# Altium PCB FPGA.PcbDoc (part 1 of 2)
Units mil, origin at the board's own origin, x right, y up, seen from the top; angles counter-clockwise.
Board outline 3947.01 x 3159.61 mil, 4 copper layers (Top Layer, Top, Mid-Layer 1, GND, Mid-Layer 2, VCC, Bottom Layer, Bottom), stack 18.2 mil thick; 141 components, 123 nets, 692 pads, 263 vias.
Unrouted connection lines stored in the file: 24.
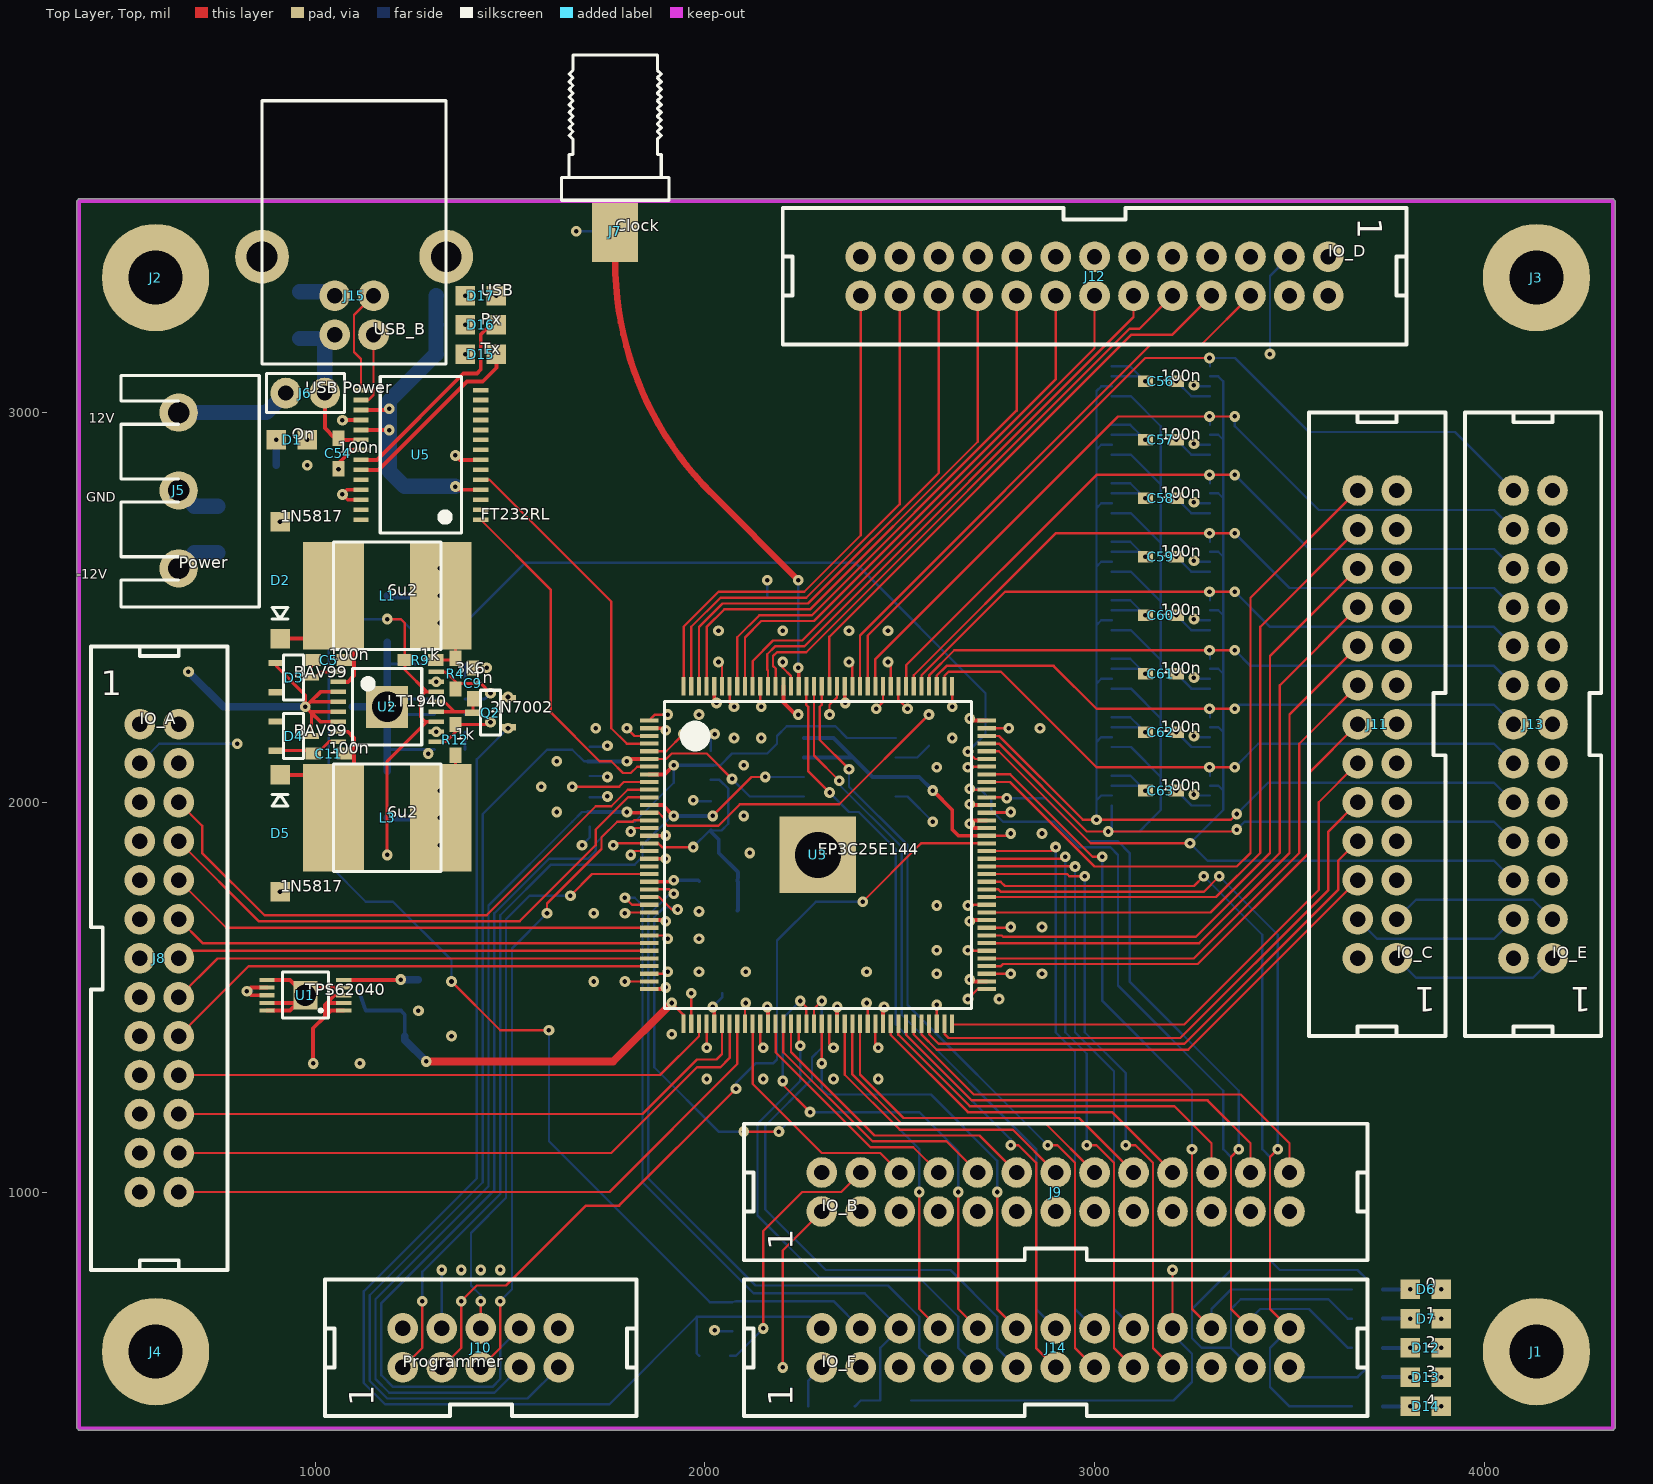
[diagram p0: Top Layer, Top view]
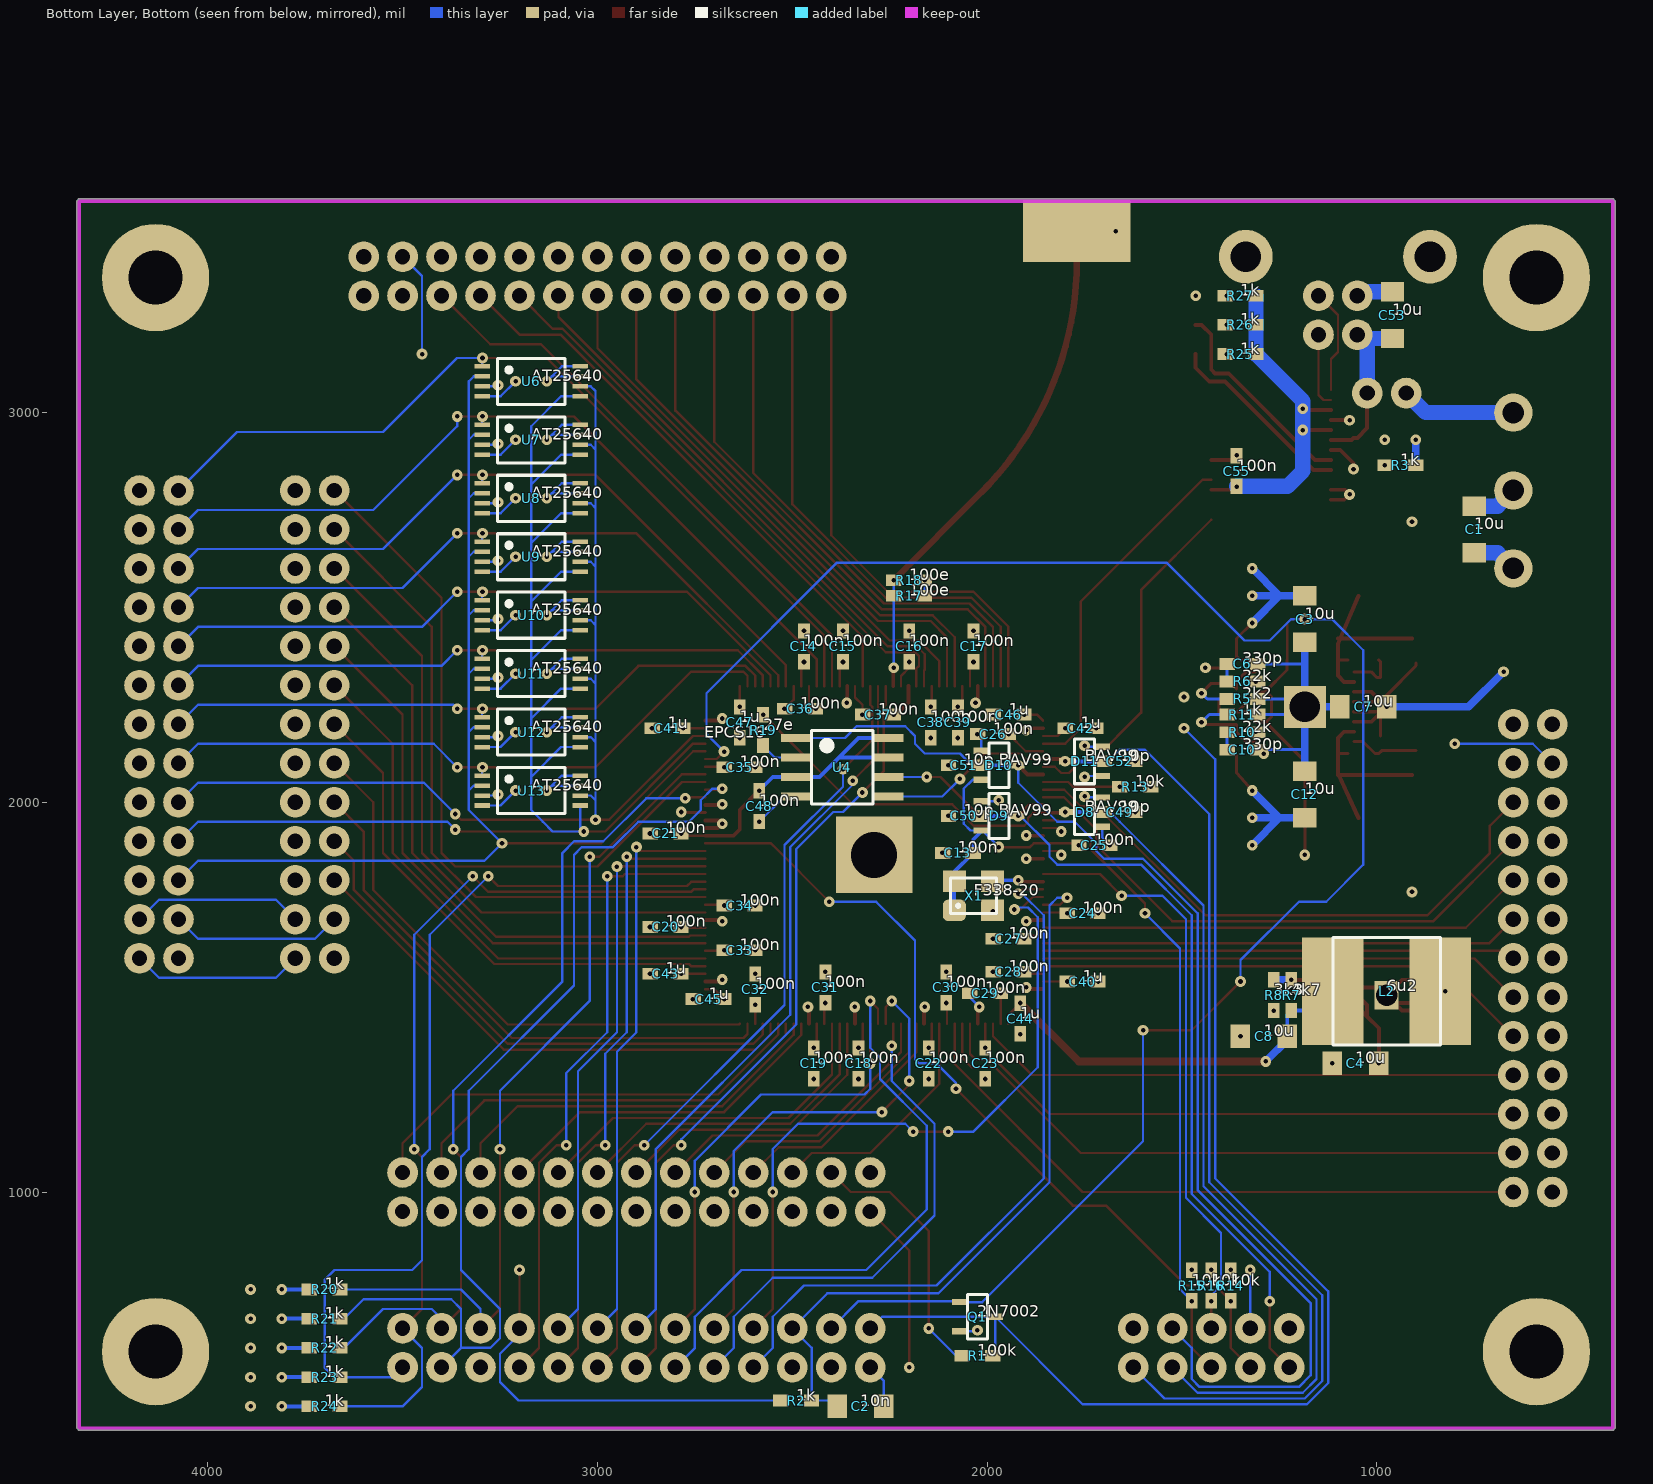
[diagram p1: Bottom Layer, Bottom view, seen from below]
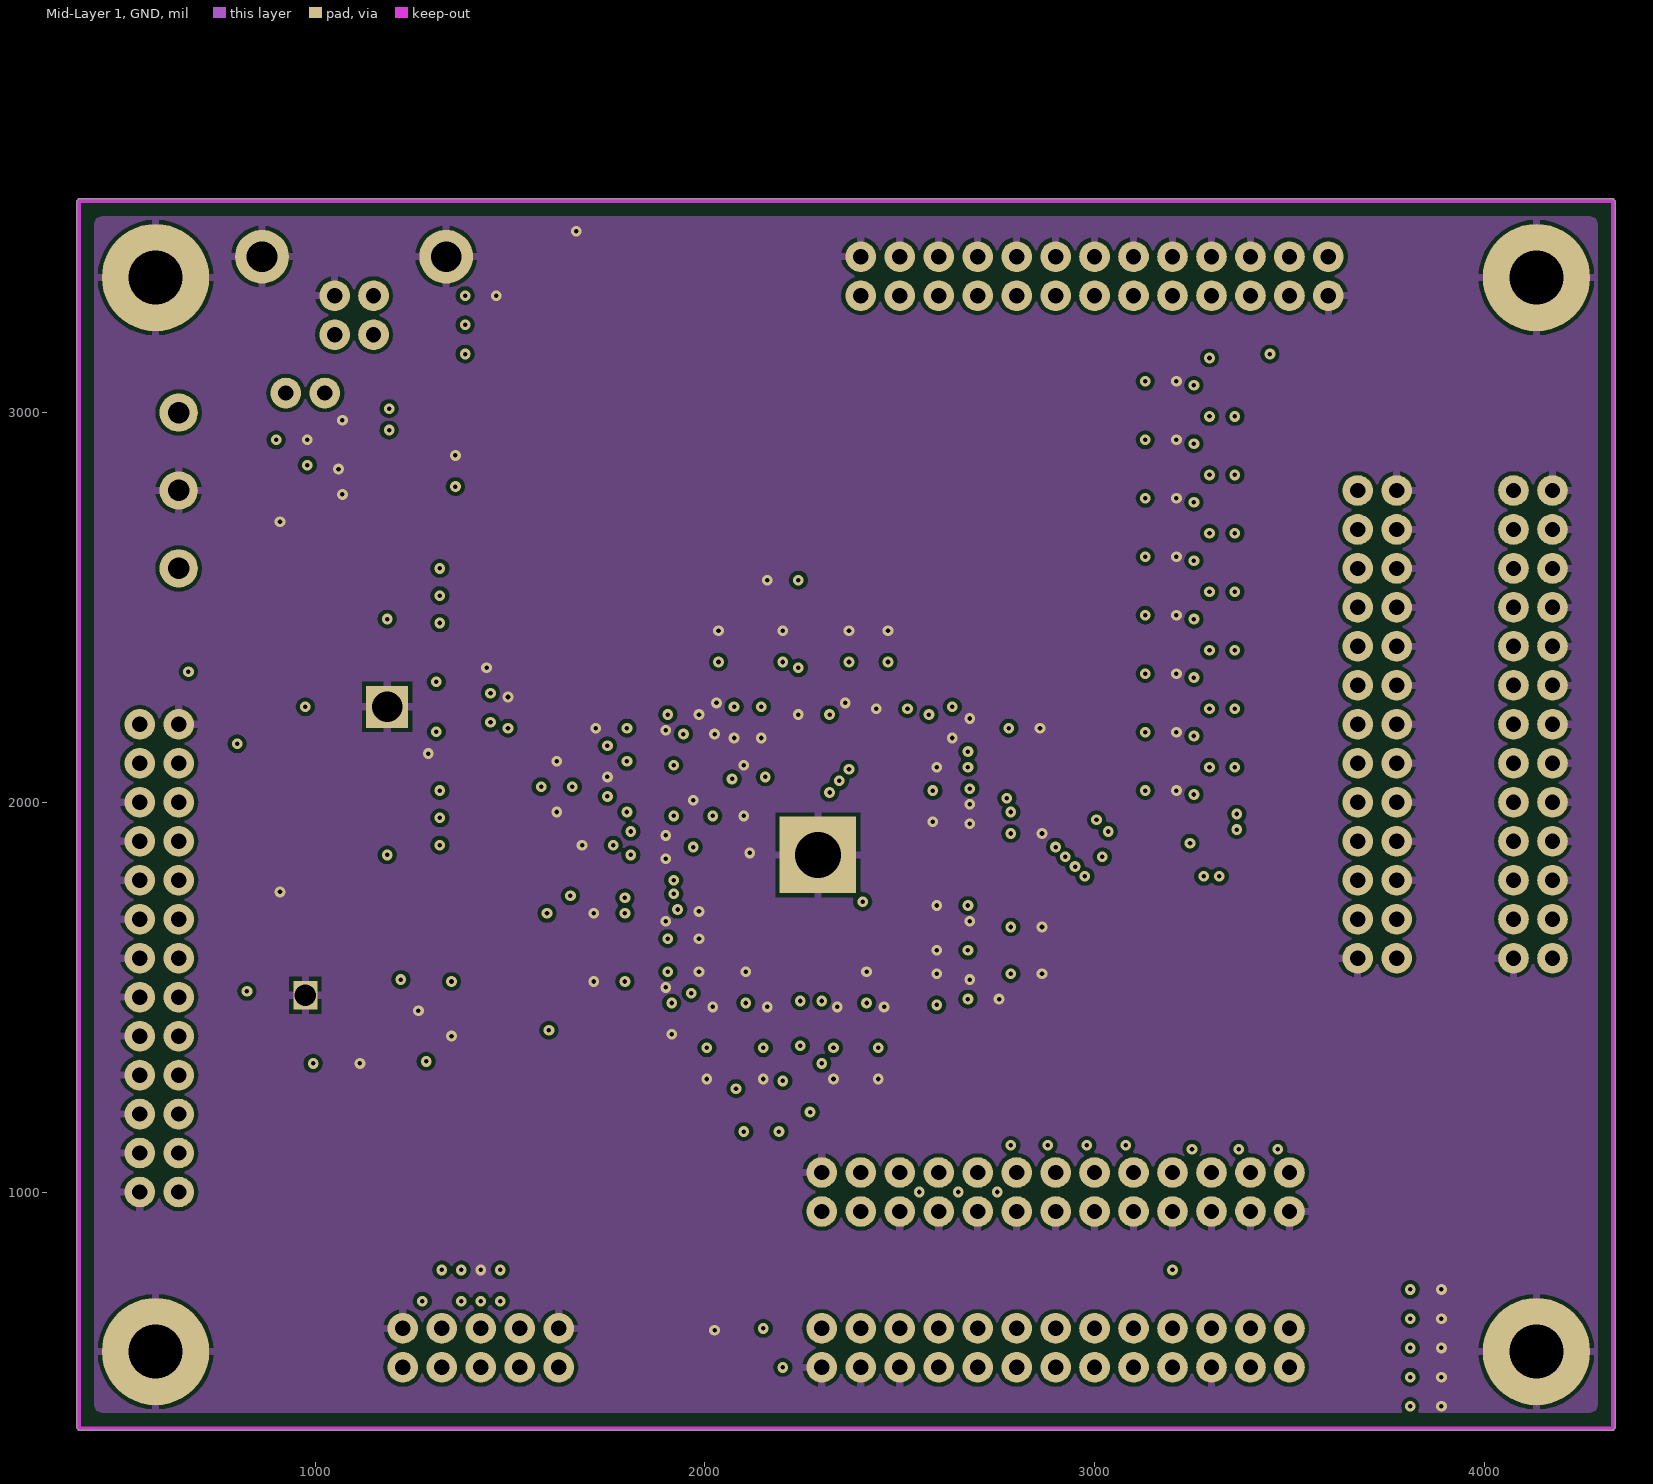
[diagram p2: Mid-Layer 1, GND]
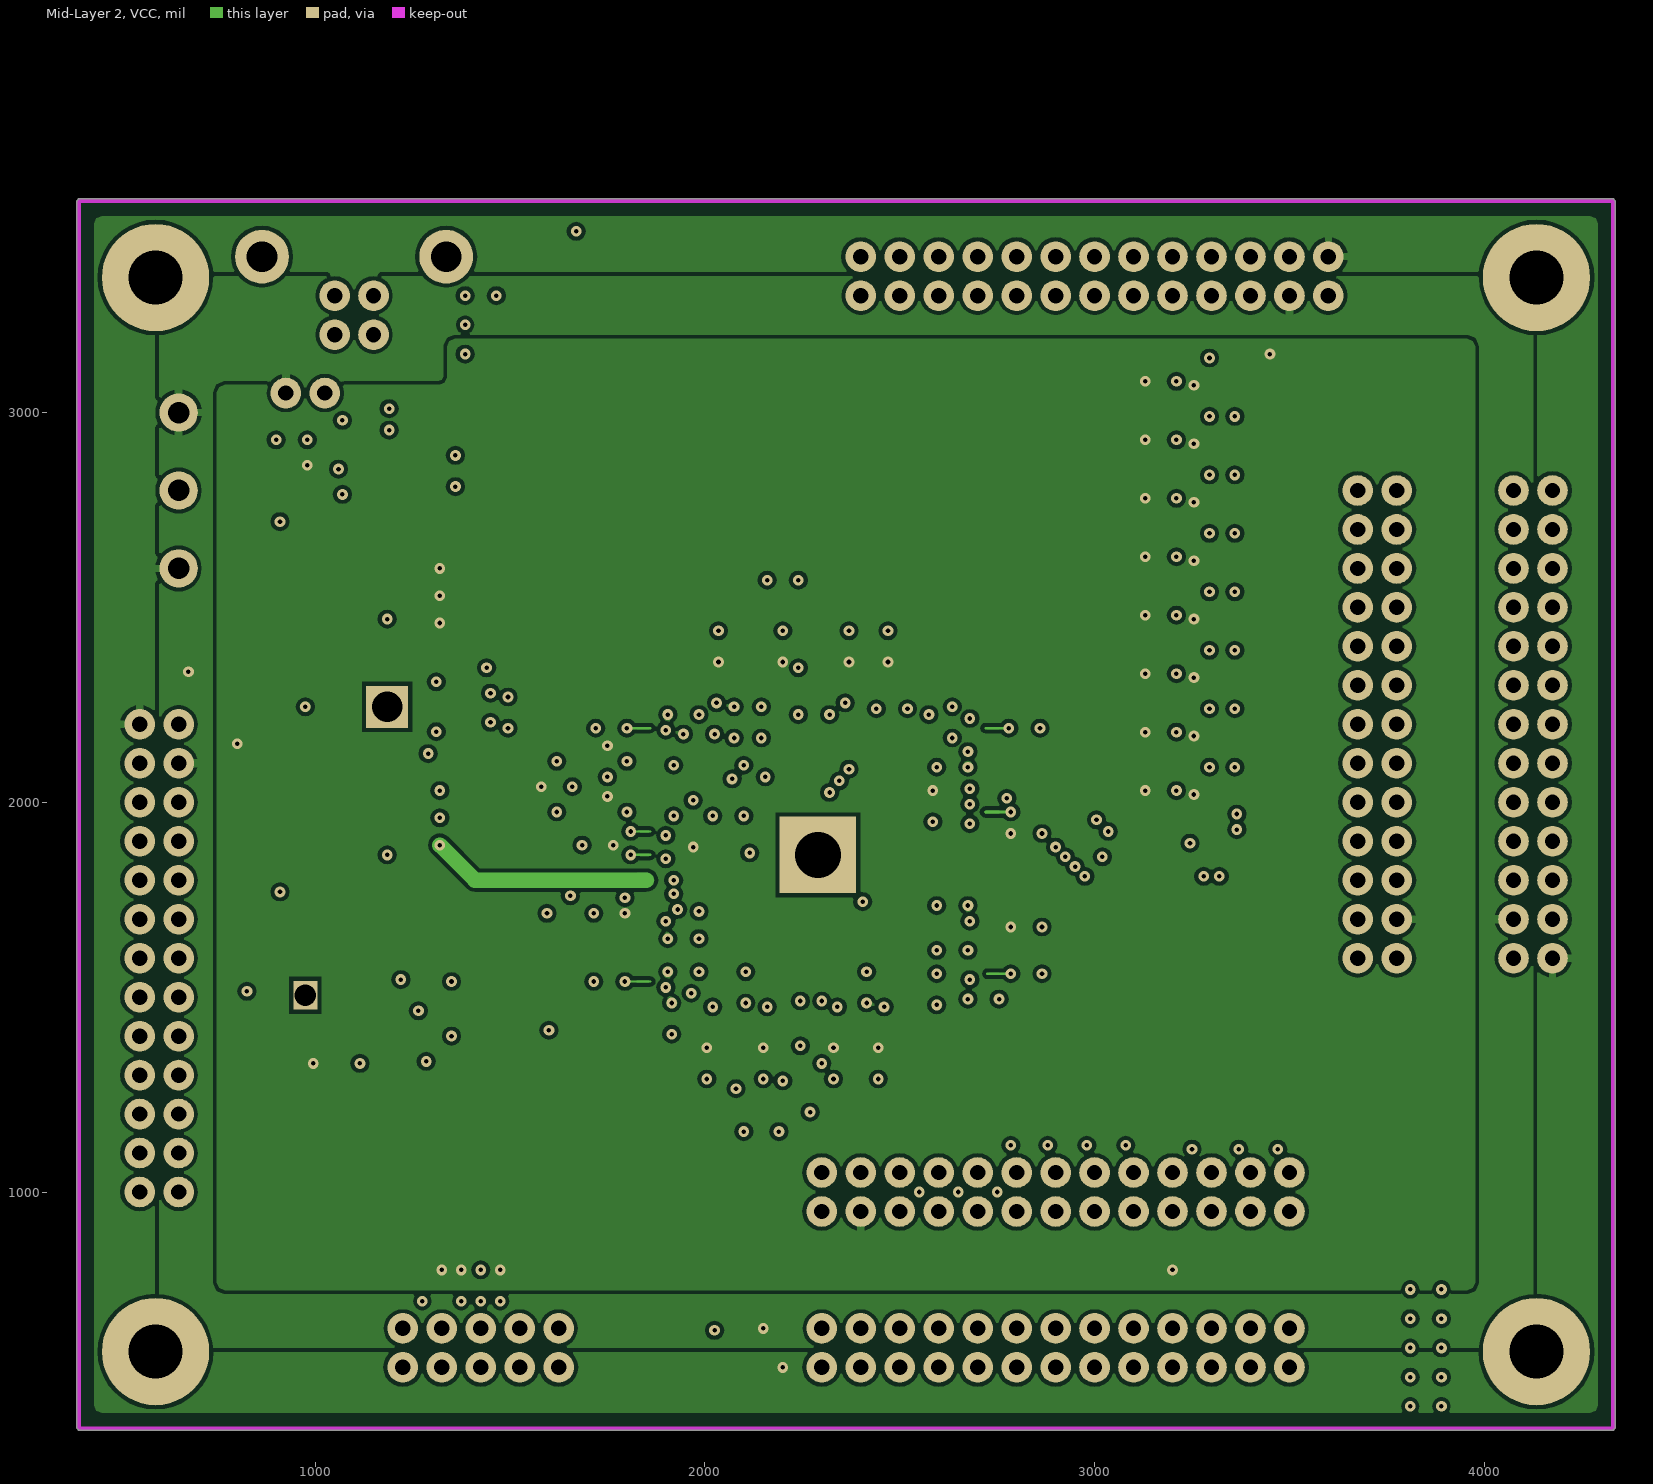
[diagram p3: Mid-Layer 2, VCC]

## Layer stack, top to bottom
Top Solder, Top Mask: solder mask 0.4, Solder Resist, Dk 3.5
Top Layer, Top: signal copper 1.4
Dielectric 1: dielectric 12.6, FR-4, Dk 4.8
Mid-Layer 1, GND: signal copper 1.4
Mid-Layer 2, VCC: signal copper 1.4
Bottom Layer, Bottom: signal copper 1.4
Bottom Solder, Bot Mask: solder mask 0.4, Solder Resist, Dk 3.5

## Board outline
388.7,393.7 393.7,388.7 4330.71,388.7 4335.71,393.7 4335.71,3543.31 4330.71,3548.31 393.7,3548.31 388.7,3543.31

## Design rules (kind name [scope] priority, off if disabled: settings)
Clearance [All] p1: gap=10 ignorepadtopadclearanceinfootprint=FALSE except(0: Arc-Hole Track-Hole SMDPad-Hole THPad-Hole Via-Hole Fill-Hole Poly-Hole Region-Hole Text-Hole; 5.91: Arc-Arc Arc-Track Arc-THPad Arc-Via Track-Track Track-THPad Track-Via THPad-THPad THPad-Via Via-Via)
PlaneClearance [All] p1: clearance=10
PolygonConnect PolygonConnect_12 [IsPolygon And InNet('3.3V') And OnLayer('Mid-Layer 2, VCC') vs IsVia] p1: connectstyle=Direct reliefconductorwidth=19.68 reliefentries=4 polygonreliefangle="90 Angle" airgapwidth=10
PolygonConnect PolygonConnect_11 [IsPolygon And InNet('3.3V') And OnLayer('Mid-Layer 2, VCC') vs IsPad] p2: connectstyle=Relief reliefconductorwidth=19.68 reliefentries=4 polygonreliefangle="90 Angle" airgapwidth=10
PolygonConnect PolygonConnect_10 [IsPolygon And InNet('12V') And OnLayer('Mid-Layer 2, VCC') vs IsVia] p3: connectstyle=Direct reliefconductorwidth=19.68 reliefentries=4 polygonreliefangle="90 Angle" airgapwidth=10
PolygonConnect PolygonConnect_9 [IsPolygon And InNet('12V') And OnLayer('Mid-Layer 2, VCC') vs IsPad] p4: connectstyle=Relief reliefconductorwidth=19.68 reliefentries=4 polygonreliefangle="90 Angle" airgapwidth=10
PolygonConnect PolygonConnect_8 [IsPolygon And InNet('-12V') And OnLayer('Mid-Layer 2, VCC') vs IsVia] p5: connectstyle=Direct reliefconductorwidth=19.68 reliefentries=4 polygonreliefangle="90 Angle" airgapwidth=10
PolygonConnect PolygonConnect_7 [IsPolygon And InNet('-12V') And OnLayer('Mid-Layer 2, VCC') vs IsPad] p6: connectstyle=Relief reliefconductorwidth=19.68 reliefentries=4 polygonreliefangle="90 Angle" airgapwidth=10
PolygonConnect PolygonConnect_6 [IsPolygon And InNet('1.2V') And OnLayer('Mid-Layer 2, VCC') vs IsVia] p7: connectstyle=Direct reliefconductorwidth=19.68 reliefentries=4 polygonreliefangle="90 Angle" airgapwidth=10
PolygonConnect PolygonConnect_5 [IsPolygon And InNet('1.2V') And OnLayer('Mid-Layer 2, VCC') vs IsPad] p8: connectstyle=Relief reliefconductorwidth=19.68 reliefentries=4 polygonreliefangle="90 Angle" airgapwidth=10
PolygonConnect PolygonConnect_4 [IsPolygon And InNet('2.5V') And OnLayer('Mid-Layer 2, VCC') vs IsVia] p9: connectstyle=Direct reliefconductorwidth=19.68 reliefentries=4 polygonreliefangle="90 Angle" airgapwidth=10
PolygonConnect PolygonConnect_3 [IsPolygon And InNet('2.5V') And OnLayer('Mid-Layer 2, VCC') vs IsPad] p10: connectstyle=Relief reliefconductorwidth=19.68 reliefentries=4 polygonreliefangle="90 Angle" airgapwidth=10
PolygonConnect PolygonConnect_2 [IsPolygon And InNet('GND') And OnLayer('Mid-Layer 1, GND') vs IsVia] p11: connectstyle=Direct reliefconductorwidth=19.68 reliefentries=4 polygonreliefangle="90 Angle" airgapwidth=10
PolygonConnect PolygonConnect_1 [IsPolygon And InNet('GND') And OnLayer('Mid-Layer 1, GND') vs IsPad] p12: connectstyle=Relief reliefconductorwidth=19.68 reliefentries=4 polygonreliefangle="90 Angle" airgapwidth=10
PolygonConnect [All] p13: connectstyle=Relief reliefconductorwidth=10 reliefentries=4 polygonreliefangle="90 Angle" airgapwidth=10
RoutingVias [All] p1: holewidth=28 width=50 viastyle="Through Hole" minholewidth=28 minwidth=50 maxholewidth=28 maxwidth=50
SolderMaskExpansion [All] p1: expansion=4
Width [All] p1: maxlimit=10 minlimit=10 preferedwidth=10
29 further rules are at their usual default settings.

## Components (designator, comment, footprint, x,y, rotation, side; value= is the part's Value field where it differs from the comment)
C1 "10u" 1206 750,2700 r90 bottom
C2 "10n" 1206 2325,450 r180 bottom
C3 "10u" 1206 1185,2470 r270 bottom
C4 "10u" 1206 1055,1330 r0 bottom
C5 "100n" 0603 1035,2365 r180 top
C6 "330p" 0603 1345,2355 r180 bottom
C7 "10u" 1206 1035,2245 r0 bottom
C8 "10u" 1206 1290,1400 r0 bottom
C9 "1n" 0603 1405,2305 r90 top
C10 "330p" 0603 1345,2135 r180 bottom
C11 "100n" 0603 1035,2125 r0 top
C12 "10u" 1206 1185,2020 r90 bottom
C13 "100n" 0603 2075,1870 r180 bottom
C14 "100n" 0603 2470,2400 r270 bottom
C15 "100n" 0603 2370,2400 r270 bottom
C16 "100n" 0603 2200,2400 r270 bottom
C17 "100n" 0603 2035,2400 r270 bottom
C18 "100n" 0603 2330,1330 r90 bottom
C19 "100n" 0603 2445,1330 r90 bottom
C20 "100n" 0603 2825,1680 r180 bottom
C21 "100n" 0603 2825,1920 r180 bottom
C22 "100n" 0603 2150,1330 r90 bottom
C23 "100n" 0603 2005,1330 r90 bottom
C24 "100n" 0603 1755,1715 r0 bottom
C25 "100n" 0603 1725,1890 r0 bottom
C26 "100n" 0603 1985,2175 r180 bottom
C27 "100n" 0603 1945,1650 r180 bottom
C28 "100n" 0603 1945,1565 r180 bottom
C29 "100n" 0603 2005,1510 r180 bottom
C30 "100n" 0603 2105,1525 r270 bottom
C31 "100n" 0603 2415,1525 r270 bottom
C32 "100n" 0603 2595,1520 r270 bottom
C33 "100n" 0603 2635,1620 r0 bottom
C34 "100n" 0603 2635,1735 r0 bottom
C35 "100n" 0603 2635,2090 r0 bottom
C36 "100n" 0603 2480,2240 r0 bottom
C37 "100n" 0603 2280,2225 r0 bottom
C38 "100n" 0603 2145,2205 r90 bottom
C39 "100n" 0603 2075,2205 r90 bottom
C40 "1u" 0603 1755,1540 r180 bottom
C41 "1u" 0603 2820,2190 r0 bottom
C42 "1u" 0603 1760,2190 r180 bottom
C43 "1u" 0603 2825,1560 r0 bottom
C44 "1u" 0603 1915,1445 r270 bottom
C45 "1u" 0603 2715,1495 r0 bottom
C46 "1u" 0603 1945,2225 r0 bottom
C47 "1u" 0603 2635,2205 r270 bottom
C48 "100n" 0603 2585,1990 r270 bottom
C49 "10p" 0603 1660,1975 r180 bottom
C50 "10p" 0603 2060,1965 r0 bottom
C51 "10p" 0603 2060,2095 r0 bottom
C52 "10p" 0603 1660,2105 r180 bottom
C53 "10u" 1206 960,3250 r90 bottom
C54 "100n" 0603 1060,2895 r270 top
C55 "100n" 0603 1360,2850 r90 bottom
C56 "100n" 0603 3170,3080 r180 top
C57 "100n" 0603 3170,2930 r180 top
C58 "100n" 0603 3170,2780 r180 top
C59 "100n" 0603 3170,2630 r180 top
C60 "100n" 0603 3170,2480 r180 top
C61 "100n" 0603 3170,2330 r180 top
C62 "100n" 0603 3170,2180 r180 top
C63 "100n" 0603 3170,2030 r180 top
D1 "On" 0805 940,2930 r0 top
D2 "1N5817" D-THT 910,2720 r270 top
D3 "BAV99" SOT-23 945,2320 r0 top
D4 "BAV99" SOT-23 945,2170 r0 top
D5 "1N5817" D-THT 910,1770 r90 top
D6 "0" 0805 3850,750 r0 top
D7 "1" 0805 3850,675 r0 top
D8 "BAV99" SOT-23 1750,1975 r0 bottom
D9 "BAV99" SOT-23 1970,1965 r180 bottom
D10 "BAV99" SOT-23 1970,2095 r180 bottom
D11 "BAV99" SOT-23 1750,2105 r0 bottom
D12 "2" 0805 3850,600 r0 top
D13 "3" 0805 3850,525 r0 top
D14 "4" 0805 3850,450 r0 top
D15 "Tx" 0805 1425,3150 r0 top
D16 "Rx" 0805 1425,3225 r0 top
D17 "USB" 0805 1425,3300 r0 top
J1 "Mount" MOUNT 4133.86,590.55 r0 top locked
J2 "Mount" MOUNT 590.55,3346.46 r0 top locked
J3 "Mount" MOUNT 4133.86,3346.46 r0 top locked
J4 "Mount" MOUNT 590.55,590.55 r0 top locked
J5 "Power" TERM-3_TERM-3(Primary) 650,2600 r90 top
J6 "USB Power" JUMPER 975,3050 r90 top
J7 "Clock" SMA 1770,3465 r270 top
J8 "IO_A" HEADER-26 550,2200 r0 top
J9 "IO_B" HEADER-26 2300,950 r90 top
J10 "Programmer" HEADER-10 1225,550 r90 top
J11 "IO_C" HEADER-26 3775,1600 r180 top
J12 "IO_D" HEADER-26 3600,3400 r270 top
J13 "IO_E" HEADER-26 4175,1600 r180 top
J14 "IO_F" HEADER-26 2300,550 r90 top
J15 "USB_B" USB_B 1150,3200 r180 top
L1 "6u2" 6.2UH 1185,2530 r180 top
L2 "6u2" 6.2UH 975,1515 r0 bottom
L3 "6u2" 6.2UH 1185,1960 r0 top
Q1 "2N7002" SOT-23 2025,680 r180 bottom
Q2 "2N7002" SOT-23 1450,2230 r180 top
R1 "100k" 0603 2025,580 r180 bottom
R2 "1k" 0603 2490,465 r180 bottom
R3 "1k" 0603 940,2865 r180 bottom
R4 "3k6" 0603 1360,2330 r270 top
R5 "2k2" 0603 1345,2265 r180 bottom
R6 "22k" 0603 1345,2310 r0 bottom
R7 "4k7" 0603 1220,1505 r90 bottom
R8 "3k3" 0603 1265,1505 r270 bottom
R9 "1k" 0603 1270,2365 r180 top
R10 "22k" 0603 1345,2180 r0 bottom
R11 "1k" 0603 1345,2225 r180 bottom
R12 "1k" 0603 1360,2160 r270 top
R13 "10k" 0603 1620,2040 r0 bottom
R14 "10k" 0603 1375,760 r270 bottom
R15 "10k" 0603 1475,760 r270 bottom
R16 "10k" 0603 1425,760 r270 bottom
R17 "100e" 0603 2200,2530 r180 bottom
R18 "100e" 0603 2200,2570 r180 bottom
R19 "27e" 0603 2575,2185 r90 bottom
R20 "1k" 0603 3700,750 r180 bottom
R21 "1k" 0603 3700,675 r180 bottom
R22 "1k" 0603 3700,600 r180 bottom
R23 "1k" 0603 3700,525 r180 bottom
R24 "1k" 0603 3700,450 r180 bottom
R25 "1k" 0603 1350,3150 r180 bottom
R26 "1k" 0603 1350,3225 r180 bottom
R27 "1k" 0603 1350,3300 r180 bottom
U1 "TPS62040" TPS62040 975,1505 r180 top
U2 "LT1940" LT1940 1185,2245 r0 top
U3 "EP3C25E144" EQFP-144 2290,1865 r0 top
U4 "EPCS16" SOIC-8 2490,2165 r180 bottom
U5 "FT232RL" SSOP-28 1425,2725 r180 top
U6 "AT25640" TSSOP-8 3170,3080 r180 bottom
U7 "AT25640" TSSOP-8 3170,2930 r180 bottom
U8 "AT25640" TSSOP-8 3170,2780 r180 bottom
U9 "AT25640" TSSOP-8 3170,2630 r180 bottom
U10 "AT25640" TSSOP-8 3170,2480 r180 bottom
U11 "AT25640" TSSOP-8 3170,2330 r180 bottom
U12 "AT25640" TSSOP-8 3170,2180 r180 bottom
U13 "AT25640" TSSOP-8 3170,2030 r180 bottom
X1 "F338-20" F338 2035,1760 r180 bottom

## Footprints (in the part's own frame and the unit in brackets; to place one, negate y for a bottom-side part, rotate by r counter-clockwise, add the part's x,y. Pads: shape width x height; smd on the part's side, far side on the other; paste and mask are expansions set on the pad)
6.2UH [mm]
  rect 4x7 smd: 1(-3.5,0) 2(3.5,0)
  silkscreen extent -3.5,-3.5 3.5,3.5
0603 [mm]
  rect 1x0.762 smd: 1(-1,0) 2(1,0)
0805 [mil]
  rect 50x50 smd: 1(-40,0) 2(40,0)
1206 [mil]
  rect 50x60 smd: 1(-60,0) 2(60,0)
D-THT [mil]
  rect 50x50 smd: 1(0,0) 2(300,0)
  silkscreen extent 220,-20 250,20
EQFP-144 [mm]
  rect 1.2x0.27 smd: 1(-11,8.75) 2(-11,8.25) 3(-11,7.75) 4(-11,7.25) 5(-11,6.75) 6(-11,6.25) 7(-11,5.75) 8(-11,5.25) 9(-11,4.75) 10(-11,4.25) 11(-11,3.75) 12(-11,3.25) 13(-11,2.75) 14(-11,2.25) 15(-11,1.75) 16(-11,1.25) 17(-11,0.75) 18(-11,0.25) 19(-11,-0.25) 20(-11,-0.75) 21(-11,-1.25) 22(-11,-1.75) 23(-11,-2.25) 24(-11,-2.75) 25(-11,-3.25) 26(-11,-3.75) 27(-11,-4.25) 28(-11,-4.75) 29(-11,-5.25) 30(-11,-5.75) 31(-11,-6.25) 32(-11,-6.75) 33(-11,-7.25) 34(-11,-7.75) 35(-11,-8.25) 36(-11,-8.75) 73(11,-8.75) 74(11,-8.25) 75(11,-7.75) 76(11,-7.25) 77(11,-6.75) 78(11,-6.25) 79(11,-5.75) 80(11,-5.25) 81(11,-4.75) 82(11,-4.25) 83(11,-3.75) 84(11,-3.25) 85(11,-2.75) 86(11,-2.25) 87(11,-1.75) 88(11,-1.25) 89(11,-0.75) 90(11,-0.25) 91(11,0.25) 92(11,0.75) 93(11,1.25) 94(11,1.75) 95(11,2.25) 96(11,2.75) 97(11,3.25) 98(11,3.75) 99(11,4.25) 100(11,4.75) 101(11,5.25) 102(11,5.75) 103(11,6.25) 104(11,6.75) 105(11,7.25) 106(11,7.75) 107(11,8.25) 108(11,8.75)
  rect 0.27x1.2 smd: 37(-8.75,-11) 38(-8.25,-11) 39(-7.75,-11) 40(-7.25,-11) 41(-6.75,-11) 42(-6.25,-11) 43(-5.75,-11) 44(-5.25,-11) 45(-4.75,-11) 46(-4.25,-11) 47(-3.75,-11) 48(-3.25,-11) 49(-2.75,-11) 50(-2.25,-11) 51(-1.75,-11) 52(-1.25,-11) 53(-0.75,-11) 54(-0.25,-11) 55(0.25,-11) 56(0.75,-11) 57(1.25,-11) 58(1.75,-11) 59(2.25,-11) 60(2.75,-11) 61(3.25,-11) 62(3.75,-11) 63(4.25,-11) 64(4.75,-11) 65(5.25,-11) 66(5.75,-11) 67(6.25,-11) 68(6.75,-11) 69(7.25,-11) 70(7.75,-11) 71(8.25,-11) 72(8.75,-11) 109(8.75,11) 110(8.25,11) 111(7.75,11) 112(7.25,11) 113(6.75,11) 114(6.25,11) 115(5.75,11) 116(5.25,11) 117(4.75,11) 118(4.25,11) 119(3.75,11) 120(3.25,11) 121(2.75,11) 122(2.25,11) 123(1.75,11) 124(1.25,11) 125(0.75,11) 126(0.25,11) 127(-0.25,11) 128(-0.75,11) 129(-1.25,11) 130(-1.75,11) 131(-2.25,11) 132(-2.75,11) 133(-3.25,11) 134(-3.75,11) 135(-4.25,11) 136(-4.75,11) 137(-5.25,11) 138(-5.75,11) 139(-6.25,11) 140(-6.75,11) 141(-7.25,11) 142(-7.75,11) 143(-8.25,11) 144(-8.75,11)
  rect 5x5 hole 3: 145(0,0)
  silkscreen extent -10,-10 10,10
F338 [mm]
  rrect50% 1.5x1.4 smd: 1(-1.25,-0.95)
  rect 1.5x1.4 smd: 2(1.25,-0.95) 3(1.25,0.95) 4(-1.25,0.95)
  silkscreen extent -1.5,-1.15 1.5,1.15
HEADER-10 [mm]
  round 2 hole 1: 1(0,0) 2(2.54,0) 3(0,-2.54) 4(2.54,-2.54) 5(0,-5.08) 6(2.54,-5.08) 7(0,-7.62) 8(2.54,-7.62) 9(0,-10.16) 10(2.54,-10.16)
  silkscreen extent -3.18,-15.24 5.72,5.08
HEADER-26 [mm]
  round 2 hole 1: 1(0,0) 2(2.54,0) 3(0,-2.54) 4(2.54,-2.54) 5(0,-5.08) 6(2.54,-5.08) 7(0,-7.62) 8(2.54,-7.62) 9(0,-10.16) 10(2.54,-10.16) 11(0,-12.7) 12(2.54,-12.7) 13(0,-15.24) 14(2.54,-15.24) 15(0,-17.78) 16(2.54,-17.78) 17(0,-20.32) 18(2.54,-20.32) 19(0,-22.86) 20(2.54,-22.86) 21(0,-25.4) 22(2.54,-25.4) 23(0,-27.94) 24(2.54,-27.94) 25(0,-30.48) 26(2.54,-30.48)
  silkscreen extent -3.17,-35.56 5.71,5.08
JUMPER [mm]
  round 2 hole 1: 1(0,1.27) 2(0,-1.27)
  silkscreen extent -1.27,-2.54 1.27,2.54
LT1940 [mm]
  rect 1x0.3 smd: 1(-3.2,2.275) 2(-3.2,1.625) 3(-3.2,0.975) 4(-3.2,0.325) 5(-3.2,-0.325) 6(-3.2,-0.975) 7(-3.2,-1.625) 8(-3.2,-2.275) 9(3.2,-2.275) 10(3.2,-1.625) 11(3.2,-0.975) 12(3.2,-0.325) 13(3.2,0.325) 14(3.2,0.975) 15(3.2,1.625) 16(3.2,2.275)
  rect 2.74x2.74 hole 2: 17(0,0)
  silkscreen extent -2.25,-2.5 2.25,2.5
MOUNT [mm]
  round 7 hole 3.5: 1(0,0)
SMA [mm]
  rect 4x3 smd: 1(0,0)
  rect 4x7 smd far side: 2(0,0)
  silkscreen extent -11.5,-3.5 -2,3.5
SOIC-8 [mm]
  rect 2x0.5 smd: 1(0,0) 2(0,-1.27) 3(0,-2.54) 4(0,-3.81) 5(6,-3.81) 6(6,-2.54) 7(6,-1.27) 8(6,0)
  silkscreen extent 1,-4.3 5,0.49
SOT-23 [mm]
  rect 1x0.41 smd: 1(-1.155,0.953) 2(-1.155,-0.953) 3(1.156,0)
  silkscreen extent -0.65,-1.46 0.65,1.46
SSOP-28 [mm]
  rect 1x0.3 smd: 1(0,0) 2(0,-0.65) 3(0,-1.3) 4(0,-1.95) 5(0,-2.6) 6(0,-3.25) 7(0,-3.9) 8(0,-4.55) 9(0,-5.2) 10(0,-5.85) 11(0,-6.5) 12(0,-7.15) 13(0,-7.8) 14(0,-8.45) 15(7.8,-8.45) 16(7.8,-7.8) 17(7.8,-7.15) 18(7.8,-6.5) 19(7.8,-5.85) 20(7.8,-5.2) 21(7.8,-4.55) 22(7.8,-3.9) 23(7.8,-3.25) 24(7.8,-2.6) 25(7.8,-1.95) 26(7.8,-1.3) 27(7.8,-0.65) 28(7.8,0)
  silkscreen extent 1.25,-9.33 6.55,0.87
TERM-3_TERM-3(Primary) [mm]
  round 2.5 hole 1.4: 1(10.16,0) 2(5.08,0) 3(0,0)
  silkscreen extent -2.5,-5.25 12.58,3.75
TPS62040 [mm]
  rect 1x0.27 smd: 1(-2.5,1) 2(-2.5,0.5) 3(-2.5,0) 4(-2.5,-0.5) 5(-2.5,-1) 6(2.5,-1) 7(2.5,-0.5) 8(2.5,0) 9(2.5,0.5) 10(2.5,1)
  rect 1.57x1.88 hole 1.4: 11(0,0)
  silkscreen extent -1.5,-1.5 1.5,1.5
TSSOP-8 [mm]
  rect 1x0.3 smd: 1(-3.2,0.975) 2(-3.2,0.325) 3(-3.2,-0.325) 4(-3.2,-0.975) 5(3.2,-0.975) 6(3.2,-0.325) 7(3.2,0.325) 8(3.2,0.975)
  silkscreen extent -2.2,-1.5 2.2,1.5
USB_B [mm]
  round 2 hole 1: 1(2.54,0) 2(0,0) 3(0,-2.54) 4(2.54,-2.54)
  round 3.5 hole 2: 5(-4.73,-5.08) 6(7.27,-5.08)
  silkscreen extent -4.73,-15.24 7.27,1.91

## Via types
v1: diameter 27.56, hole 11.81, Top Layer, Top to Bottom Layer, Bottom, 263 vias

## Nets (pads, with @x,y where several pads share a name; then routed paths per layer and width w, separated by ;. In a path a pad name is that pad's centre, name@x,y a point inside that pad or via, vN(x,y) a via of type N, cw(c..) or ccw(c..) an arc to the next point about the centre after c; other vN are vias at no path point)
1.2V: C8.1 C26.2 C27.2 C28.2 C29.2 C30.2 C31.2 C32.2 C33.2 C34.2 C35.2 C36.2 C37.2 C38.2 C39.2 C44.1 C45.1 C46.1 C47.1 L2.2 R7.1 U3.1 U3.5 U3.29 U3.34 U3.37 U3.38 U3.45 U3.61 U3.70 U3.73 U3.78 U3.84 U3.102 U3.109 U3.116 U3.124 U3.134 U3.138 | length 2085.6
  Top Layer, Top w5.98: U3.34@1856.93,1559.88 1899.88,1559.88 v1(1905,1565) ; U3.29@1856.93,1658.31 1861.93,1658.31 1896.69,1658.31 v1(1905,1650) ; U3.5@1856.93,2130.75 1900.75,2130.75 v1(1945,2175) ; U3.1@1856.93,2209.49 1872.44,2225 v1(1905,2225) ; v1(1915,1485) 1945.51,1454.49 U3.37@1945.51,1431.93 ; v1(1965,1510) 1965.2,1509.8 U3.38@1965.2,1431.93 ; U3.138@2063.62,2298.07 2063.62,2256.38 v1(2075,2245) ; U3.45@2102.99,1431.93 2102.99,1482.99 v1(2105,1485) ; U3.134@2142.36,2298.07 2142.36,2247.64 v1(2145,2245) ; v1(2320,2225) 2320,2250 2339.21,2269.21 U3.124@2339.21,2298.07 ; v1(2415,1485) 2417.95,1482.05 U3.61@2417.95,1431.93 ; U3.116@2496.69,2298.07 2496.69,2263.31 v1(2520,2240) ; v1(2595,1480) 2595.12,1479.88 U3.70@2595.12,1431.93 ; U3.109@2634.49,2298.07 2634.49,2245.51 v1(2635,2245) ; v1(2675,1495) 2700.51,1520.51 U3.73@2723.07,1520.51 ; v1(2675,1620) 2676.06,1618.94 U3.78@2723.07,1618.94 ; v1(2675,1735) 2677.05,1737.05 U3.84@2723.07,1737.05 ; v1(2675,2090) 2676.38,2091.38 U3.102@2723.07,2091.38
  Top Layer, Top w19.68: v1(1285,1335) 1765,1335 v1(1915,1485)
  Bottom Layer, Bottom w5.98: v1(1905,1565) C28.2@1905.63,1565 ; v1(1905,1650) C27.2@1905.63,1650 ; v1(1905,2225) C46.1@1905.63,2225 ; C44.1@1915,1484.37 v1(1915,1485) ; v1(1945,2175) C26.2@1945.63,2175 ; v1(1965,1510) C29.2@1965.63,1510 ; C39.2@2075,2244.37 v1(2075,2245) ; v1(2105,1485) C30.2@2105,1485.63 ; C38.2@2145,2244.37 v1(2145,2245) ; C37.2@2319.37,2225 v1(2320,2225) ; v1(2415,1485) C31.2@2415,1485.63 ; C36.2@2519.37,2240 v1(2520,2240) ; v1(2595,1480) C32.2@2595,1480.63 ; C47.1@2635,2244.37 v1(2635,2245) ; C33.2@2674.37,1620 v1(2675,1620) ; C34.2@2674.37,1735 v1(2675,1735) ; C35.2@2674.37,2090 v1(2675,2090) ; v1(2675,1495) C45.1@2675.63,1495
  Bottom Layer, Bottom w9.84: L2.2@1112.8,1515 1130,1465 1130.63,1465.63 R7.1@1220,1465.63 1220,1465 1230,1455 C8.1@1230,1400
  Bottom Layer, Bottom w19.68: C8.1@1230,1400 1230,1390 v1(1285,1335)
2.5V: C12.1 C40.1 C41.1 C42.1 C43.1 L3.2 R12.2 U3.3 U3.15 U3.18 U3.35 U3.75 U3.96 U3.107 | length 1831.8
  Top Layer, Top w5.98: v1(1795,1540) 1795.2,1540.2 U3.35@1856.93,1540.2 ; v1(1800,2190) 1819.88,2170.12 U3.3@1856.93,2170.12 ; v1(1810,1865) 1819.84,1874.84 U3.18@1856.93,1874.84 ; v1(1810,1925) 1818.9,1933.9 U3.15@1856.93,1933.9 ; U3.75@2723.07,1559.88 2779.88,1559.88 v1(2785,1560) ; U3.107@2723.07,2189.8 2779.8,2189.8 v1(2780,2190)
  Top Layer, Top w7.87: v1(1320,2030) 1360,2075 R12.2@1360,2120.63 ; U3.96@2723.07,1973.27 2783.27,1973.27 v1(2785,1975)
  Top Layer, Top w19.68: v1(1320,1960) L3.2@1322.8,1960
  Mid-Layer 2, VCC w5.98: v1(1795,1540) 1860,1540 ; v1(1800,2190) 1860,2190 ; v1(1810,1865) 1860,1865 ; v1(1810,1925) 1860,1925 ; 2720,2190 v1(2780,2190) ; 2725,1560 v1(2785,1560)
  Mid-Layer 2, VCC w7.87: 2720,1975 v1(2785,1975)
  Mid-Layer 2, VCC w39.37: v1(1320,1890) 1410,1800 1850,1800
  Bottom Layer, Bottom w5.98: C40.1@1794.37,1540 v1(1795,1540) ; C42.1@1799.37,2190 v1(1800,2190) ; v1(2780,2190) C41.1@2780.63,2190 ; v1(2785,1560) C43.1@2785.63,1560
  Bottom Layer, Bottom w19.68: C12.1@1185,1960 1250,1960 ; v1(1320,1890) 1250,1960 ; v1(1320,1960) 1250,1960 ; v1(1320,2030) 1250,1960
3.3V: C3.1 C4.1 C13.2 C14.2 C15.2 C16.2 C17.2 C18.2 C19.2 C20.2 C21.2 C22.2 C23.2 C24.2 C25.2 C48.1 C56.2 C57.2 C58.2 C59.2 C60.2 C61.2 C62.2 C63.2 D8.2 D9.2 D10.2 D11.2 J8.3 J9.3 J10.4 J11.3 J12.3 J13.3 J14.20 L1.1 R2.1 R3.1 R4.1 R9.1 R13.1 R14.1 R15.1 U1.1 U1.2 U1.3 U3.17 U3.26 U3.40 U3.47 U3.56 U3.62 U3.81 U3.93 U3.117 U3.122 U3.130 U3.139 U4.3 U4.7 U4.8 U6.3 U6.7 U6.8 U7.3 U7.7 U7.8 U8.3 U8.7 U8.8 U9.3 U9.7 U9.8 U10.3 U10.7 U10.8 U11.3 U11.7 U11.8 U12.3 U12.7 U12.8 U13.3 U13.7 U13.8 X1.1 X1.4 | length 7006.1
  Top Layer, Top w5.98: v1(1765,1890) 1769.53,1894.53 U3.17@1856.93,1894.53 1880.47,1894.53 1890,1885 v1(1970,1885) ; v1(1795,1715) 1797.36,1717.36 U3.26@1856.93,1717.36 ; U3.40@2004.57,1431.93 2004.57,1370.43 v1(2005,1370) ; v1(2035,2360) 2043.94,2351.06 U3.139@2043.94,2298.07 ; U3.47@2142.36,1431.93 2142.36,1377.64 v1(2150,1370) ; v1(2200,2360) 2200,2345 2221.1,2323.9 U3.130@2221.1,2298.07 ; U3.56@2319.53,1431.93 2319.53,1380.47 v1(2330,1370) ; v1(2370,2360) 2378.58,2351.42 U3.122@2378.58,2298.07 ; U3.62@2437.64,1431.93 2437.64,1377.36 v1(2445,1370) ; v1(2470,2360) 2477.01,2352.99 U3.117@2477.01,2298.07 ; U3.81@2723.07,1677.99 2777.99,1677.99 v1(2785,1680) ; U3.93@2723.07,1914.21 2779.21,1914.21 v1(2785,1920) ; v1(3130,2030) C63.2@3130.63,2030 ; v1(3130,2180) C62.2@3130.63,2180 ; v1(3130,2330) C61.2@3130.63,2330 ; v1(3130,2480) C60.2@3130.63,2480 ; v1(3130,2630) C59.2@3130.63,2630 ; v1(3130,2780) C58.2@3130.63,2780 ; v1(3130,2930) C57.2@3130.63,2930 ; v1(3130,3080) C56.2@3130.63,3080 ; J14.20@3200,650 v1(3200,800)
  Top Layer, Top w7.87: R9.1@1309.37,2365 1350,2365 R4.1@1360,2375 ; v1(1320,2460) 1360,2420 R4.1@1360,2375 ; R4.1@1360,2369.37 R4.1@1360,2375
  Top Layer, Top w9.84: v1(995,1330) 995,1420 1025,1450 ; U1.1@1073.43,1465.63 1040.63,1465.63 1025,1450 ; U1.2@1073.43,1485.32 1030.32,1485.32 ; U1.3@1073.43,1505 1050,1505 1030.32,1485.32 ; v1(2585,2030) 2635,1980 2635,1930 2650.79,1914.21 U3.93@2723.07,1914.21 ; 1025,1450 1025,1480 1030.32,1485.32
  Top Layer, Top w19.68: v1(1320,2530) L1.1@1322.8,2530
  Bottom Layer, Bottom w5.98: J8.3@550,2100 600,2150 v1(800,2150) ; J10.4@1325,650 v1(1325,800) ; R14.1@1375,799.37 v1(1375,800) ; R15.1@1475,799.37 v1(1475,800) ; v1(1580,2040) R13.1@1580.63,2040 ; D8.2@1704.53,2012.5 1747.5,2012.5 v1(1750,2015) ; D11.2@1704.53,2142.5 1747.5,2142.5 v1(1750,2145) ; C25.2@1764.37,1890 v1(1765,1890) ; C24.2@1794.37,1715 v1(1795,1715) ; v1(1970,1885) 2012.5,1927.5 D9.2@2015.47,1927.5 2042.5,1927.5 2060,1945 2060,2000 2060,2035 2037.5,2057.5 D10.2@2015.47,2057.5 ; C23.2@2005,1369.37 v1(2005,1370) ; v1(2035,2360) C17.2@2035,2360.63 ; C22.2@2150,1369.37 v1(2150,1370) ; v1(2200,2360) C16.2@2200,2360.63 ; C18.2@2330,1369.37 v1(2330,1370) ; v1(2370,2360) C15.2@2370,2360.63 ; C19.2@2445,1369.37 v1(2445,1370) ; v1(2470,2360) C14.2@2470,2360.63 ; R2.1@2529.37,465 3202.5,465 3250,512.5 3250,585 3200,635 J14.20@3200,650 ; v1(2785,1680) C20.2@2785.63,1680 ; v1(2785,1920) C21.2@2785.63,1920 ; U13.7@3044.02,2042.8 3117.2,2042.8 ; U13.8@3044.02,2068.39 3091.61,2068.39 3117.2,2042.8 ; U12.7@3044.02,2192.8 3117.2,2192.8 ; U12.8@3044.02,2218.39 3091.61,2218.39 3117.2,2192.8 ; U11.7@3044.02,2342.8 3117.2,2342.8 ; U11.8@3044.02,2368.39 3091.61,2368.39 3117.2,2342.8 ; U10.7@3044.02,2492.8 3117.2,2492.8 ; U10.8@3044.02,2518.39 3091.61,2518.39 3117.2,2492.8 ; U9.7@3044.02,2642.8 3117.2,2642.8 ; U9.8@3044.02,2668.39 3091.61,2668.39 3117.2,2642.8 ; U8.7@3044.02,2792.8 3117.2,2792.8 ; U8.8@3044.02,2818.39 3091.61,2818.39 3117.2,2792.8 ; U7.7@3044.02,2942.8 3117.2,2942.8 ; U7.8@3044.02,2968.39 3091.61,2968.39 3117.2,2942.8 ; U6.7@3044.02,3092.8 3117.2,3092.8 ; U6.8@3044.02,3118.39 3091.61,3118.39 3117.2,3092.8 ; v1(3130,2030) 3117.2,2042.8 ; v1(3130,2180) 3117.2,2192.8 ; v1(3130,2330) 3117.2,2342.8 ; v1(3130,2480) 3117.2,2492.8 ; v1(3130,2630) 3117.2,2642.8 ; v1(3130,2780) 3117.2,2792.8 ; v1(3130,2930) 3117.2,2942.8 ; v1(3130,3080) 3117.2,3092.8 ; v1(3255,2020) 3257.8,2017.2 U13.3@3295.98,2017.2 ; v1(3255,2170) 3257.8,2167.2 U12.3@3295.98,2167.2 ; v1(3255,2320) 3257.8,2317.2 U11.3@3295.98,2317.2 ; v1(3255,2470) 3257.8,2467.2 U10.3@3295.98,2467.2 ; v1(3255,2620) 3257.8,2617.2 U9.3@3295.98,2617.2 ; v1(3255,2770) 3257.8,2767.2 U8.3@3295.98,2767.2 ; v1(3255,2920) 3257.8,2917.2 U7.3@3295.98,2917.2 ; v1(3255,3070) 3257.8,3067.2 U6.3@3295.98,3067.2 ; v1(3450,3150) 3450,3350 J12.3@3500,3400 ; J11.3@3775,1700 3825,1750 4125,1750 J13.3@4175,1700
  Bottom Layer, Bottom w9.84: D9.2@2015.47,1927.5 2015,1925 2035.63,1904.37 C13.2@2035.63,1870 2085,1820.63 2085,1810 X1.4@2084.21,1797.4 2085,1795 2085,1723.39 X1.1@2084.21,1722.6 ; U4.7@2253.78,2115 2380,2115 ; U4.8@2253.78,2165 2330,2165 2380,2115 ; C48.1@2585,2029.37 v1(2585,2030) 2550,2065 U4.3@2490,2065 2430,2065 2390,2105 ; 2380,2115 2390,2105 ; 2380,2115 2390,2105
  Bottom Layer, Bottom w19.68: R3.1@979.37,2865 v1(980,2865) ; C3.1@1185,2530 1250,2530 ; v1(1320,2460) 1250,2530 ; v1(1320,2530) 1250,2530 ; v1(1320,2600) 1250,2530
3.3VUSB: C55.1 R25.2 R26.2 R27.2 U5.4 U5.17 U5.19 | length 913.7
  Top Layer, Top w9.84: U5.19@1117.91,2955.32 1189.68,2955.32 v1(1190,2955) ; U5.17@1117.91,3006.5 1186.5,3006.5 v1(1190,3010) ; U5.4@1425,2801.77 v1@1368.23,2801.77 ; v1@1368.23,2801.77 v1(1360,2810) v1@1368.23,2801.77
  Bottom Layer, Bottom w9.84: v1(1360,2810) C55.1@1360,2810.63
  Bottom Layer, Bottom w39.37: R27.2@1310.63,3300 1310,3299.37 1310,3225.63 R26.2@1310.63,3225 1310,3224.37 1310,3150.63 R25.2@1310.63,3150 1190,3029.37 v1(1190,3010) v1(1190,2955) 1190,2850 1229.37,2810.63 C55.1@1360,2810.63
5V: C53.1 C54.1 J6.2 J15.1 U5.20 | length 436.5
  Top Layer, Top w9.84: J6.2@1025,3050 1025,2960 1050,2935 C54.1@1060,2934.37 1060,2935 1065.28,2929.72 U5.20@1117.91,2929.72
  Bottom Layer, Bottom w39.37: C53.1@960,3190 J15.1@1040,3190 ; J6.2@1025,3050 1025,3175 J15.1@1040,3190 ; J15.1@1050,3200 J15.1@1040,3190
12V: C7.1 D3.1 D4.3 J5.1 J6.1 J8.4 J9.4 J11.4 J12.4 J13.4 R1.1 U2.3 U2.4 U2.5 U2.6 | length 2318.6
  Top Layer, Top w5.98: v1(2150,650) 2150,900 2250,1000 2350,1000 J9.4@2400,1050
  Top Layer, Top w7.87: D3.1@899.53,2357.5 899.53,2350.47 975,2275 v1@975,2247.03 ; v1(975,2245) 987.8,2232.2 990.53,2229.47 D4.3@990.53,2170
  Top Layer, Top w9.84: v1@975,2247.03 v1(975,2245) ; U2.6@1059.02,2206.61 1013.39,2206.61 990.53,2229.47 987.8,2232.2 ; U2.5@1059.02,2232.2 987.8,2232.2 ; U2.4@1059.02,2257.8 987.8,2257.8 ; U2.3@1059.02,2283.39 1013.39,2283.39 987.8,2257.8 ; v1(975,2245) 987.8,2232.2 ; v1(975,2245) 987.8,2257.8
  Bottom Layer, Bottom w5.98: R1.1@2064.37,580 2080,580 v1(2150,650) ; J11.4@3675,1700 3725,1650 4025,1650 J13.4@4075,1700
  Bottom Layer, Bottom w19.68: v1(675,2335) 765,2245 v1(975,2245)
  Bottom Layer, Bottom w39.37: J5.1@650,3000 875,3000 J6.1@925,3050
20MHZ: U3.22 X1.3 | length 131.5
  Top Layer, Top w9.84: U3.22@1856.93,1796.1 1916.1,1796.1 v1(1920,1800)
  Bottom Layer, Bottom w9.84: v1(1920,1800) 1983.19,1800 X1.3@1985.79,1797.4
-12V: C1.1 J5.3 J8.1 J9.1 J11.1 J12.1 J13.1 | length 1001.6
  Top Layer, Top w5.98: v1(2200,550) 2200,850 J9.1@2300,950
  Mid-Layer 2, VCC w9.84: J5.3@648.43,2598.43 J5.3@650,2600
  Bottom Layer, Bottom w5.98: J11.1@3775,1600 3825,1550 4125,1550 J13.1@4175,1600
  Bottom Layer, Bottom w39.37: J5.3@650,2600 690,2640 C1.1@750,2640
ASD: C52.1 D11.3 J10.9 U3.6 U4.5 | length 3070.3
  Top Layer, Top w5.98: U3.6@1856.93,2111.06 1901.06,2111.06 1915,2125 2005,2125 v1(2070,2060)
  Top Layer, Top w9.84: v1(1800,2105) 1806.06,2111.06 U3.6@1856.93,2111.06
  Bottom Layer, Bottom w5.98: J10.9@1625,550 1545,470 1185,470 1140,515 1140,735 1430,1025 1430,1970 1595,2135 1660,2135 1690,2105 C52.1@1699.37,2105 ; v1(2070,2060) 2115,2015 U4.5@2253.78,2015
  Bottom Layer, Bottom w9.84: C52.1@1699.37,2105 D11.3@1795.53,2105 v1(1800,2105)
CLOCK: J7.1 R17.1 R18.1 U3.129 | length 1327.6
  Top Layer, Top w9.84: v1(2240,2345) 2240.79,2344.21 U3.129@2240.79,2298.07
  Top Layer, Top w16.38: J7.1@1770,3465 1770,3387.94 ccw(c2610,3387.94) 2016.03,2793.97 v1(2240,2570)
  Bottom Layer, Bottom w5.98: v1(2240,2345) 2240,2529.37 R17.1@2239.37,2530 2240,2530 2240,2569.37 R18.1@2239.37,2570 v1(2240,2570)
CONF_DONE: J10.3 R14.2 U3.92 | length 2213.4
  Top Layer, Top w5.98: J10.3@1325,550 1375,600 v1(1375,720) 1415,760 1490,760 1695,965 1780,965 v1(2080,1265) ; v1(2405,1745) 2550,1890 2554.53,1894.53 U3.92@2723.07,1894.53
  Bottom Layer, Bottom w5.98: v1(1375,720) R14.2@1375,720.63 ; v1(2080,1265) 2080,1280 2130,1330 2175,1330 2185,1340 2185,1645 2285,1745 v1(2405,1745)
DATA0: C49.1 D8.3 J10.7 R19.2 U3.13 | length 3115
  Top Layer, Top w5.98: U3.13@1856.93,1973.27 1881.73,1973.27 1895,1960 1895,1950 1905,1940 2035,1940 2090,1995 2345,1995 v1(2575,2225)
  Top Layer, Top w9.84: v1(1800,1975) 1801.73,1973.27 U3.13@1856.93,1973.27
  Bottom Layer, Bottom w5.98: J10.7@1525,550 1460,485 1190,485 1155,520 1155,725 1445,1015 1445,1735 1660,1950 1685,1975 C49.1@1699.37,1975 ; R19.2@2575,2224.37 v1(2575,2225)
  Bottom Layer, Bottom w9.84: C49.1@1699.37,1975 D8.3@1795.53,1975 v1(1800,1975)
DCLK: C50.1 D9.3 J10.1 U3.12 U4.6 | length 2282.9
  Top Layer, Top w5.98: J10.1@1225,550 1275,600 v1(1275,720) ; v1(2020,1965) 2120,2065 v1(2155,2065)
  Top Layer, Top w9.84: U3.12@1856.93,1992.95 1892.05,1992.95 v1(1920,1965)
  Bottom Layer, Bottom w5.98: v1(1275,720) 1275,795 1475,995 1475,1710 1605,1840 1820,1840 1840,1860 1840,1890 1915,1965 v1(1920,1965) ; v1(2020,1965) C50.1@2020.63,1965 ; v1(2155,2065) U4.6@2253.78,2065
  Bottom Layer, Bottom w9.84: v1(1920,1965) D9.3@1924.47,1965 v1(2020,1965) C50.1@2020.63,1965
EEPROM_0: J13.26 U3.120 U6.1 | length 2244.7
  Top Layer, Top w5.98: U3.120@2417.95,2298.07 2417.95,2427.95 3130,3140 v1(3295,3140)
  Bottom Layer, Bottom w5.98: U6.1@3295.98,3118.39 3295.98,3139.02 v1(3295,3140) 3360,3140 3550,2950 3925,2950 J13.26@4075,2800
EEPROM_1: J13.24 U3.119 U7.1 | length 2121.5
  Top Layer, Top w5.98: U3.119@2437.64,2298.07 2437.64,2367.64 3060,2990 v1(3295,2990) v1(3360,2990)
  Bottom Layer, Bottom w5.98: v1(3295,2990) 3295.98,2989.02 U7.1@3295.98,2968.39 ; v1(3360,2990) 3360,2965 3575,2750 4025,2750 J13.24@4075,2700
EEPROM_2: J13.22 U3.115 U8.1 | length 1935.8
  Top Layer, Top w5.98: U3.115@2516.38,2298.07 2516.38,2351.38 3005,2840 v1(3295,2840) v1(3360,2840)
  Bottom Layer, Bottom w5.98: v1(3295,2840) 3295.98,2839.02 U8.1@3295.98,2818.39 ; v1(3360,2840) 3550,2650 4025,2650 J13.22@4075,2600
EEPROM_3: J13.20 U3.114 U9.1 | length 1818.4
  Top Layer, Top w5.98: U3.114@2536.06,2298.07 2536.06,2326.06 2900,2690 v1(3295,2690) v1(3360,2690)
  Bottom Layer, Bottom w5.98: v1(3295,2690) 3295.98,2689.02 U9.1@3295.98,2668.39 ; v1(3360,2690) 3500,2550 4025,2550 J13.20@4075,2500
EEPROM_4: J13.18 U3.113 U10.1 | length 1715.7
  Top Layer, Top w5.98: U3.113@2555.75,2298.07 2555.75,2325.75 2770,2540 v1(3295,2540) v1(3360,2540)
  Bottom Layer, Bottom w5.98: v1(3295,2540) 3295.98,2539.02 U10.1@3295.98,2518.39 ; v1(3360,2540) 3450,2450 4025,2450 J13.18@4075,2400
EEPROM_5: J13.16 U3.112 U11.1 | length 1613
  Top Layer, Top w5.98: U3.112@2575.43,2298.07 2575.43,2325.43 2640,2390 v1(3295,2390) v1(3360,2390)
  Bottom Layer, Bottom w5.98: v1(3295,2390) 3295.98,2389.02 U11.1@3295.98,2368.39 ; v1(3360,2390) 3400,2350 4025,2350 J13.16@4075,2300
EEPROM_6: J13.14 U3.111 U12.1 | length 1609.7
  Top Layer, Top w5.98: U3.111@2595.12,2298.07 2595.12,2325.12 2620,2350 2895,2350 3005,2240 v1(3295,2240) v1(3360,2240)
  Bottom Layer, Bottom w5.98: v1(3295,2240) 3295.98,2239.02 U12.1@3295.98,2218.39 ; v1(3360,2240) 3370,2250 4025,2250 J13.14@4075,2200
EEPROM_7: J13.12 U3.110 U13.1 | length 1660.2
  Top Layer, Top w5.98: U3.110@2614.8,2298.07 2614.8,2324.8 2625,2335 2760,2335 3005,2090 v1(3295,2090) v1(3360,2090)
  Bottom Layer, Bottom w5.98: v1(3295,2090) 3295.98,2089.02 U13.1@3295.98,2068.39 ; v1(3360,2090) 3420,2150 4025,2150 J13.12@4075,2100
EEPROM_SCK: J13.10 U3.106 U6.6 U7.6 U8.6 U9.6 U10.6 U11.6 U12.6 U13.6 | length 2953.7
  Top Layer, Top w5.98: U3.106@2723.07,2170.12 2754.88,2170.12 2970,1955 v1(3005,1955) 3350,1955 v1(3365,1970)
  Bottom Layer, Bottom w5.98: v1(3005,1955) 3005,2005 ; U13.6@3044.02,2017.2 3017.2,2017.2 3005,2005 ; U12.6@3044.02,2167.2 3017.2,2167.2 3005,2155 ; U11.6@3044.02,2317.2 3017.2,2317.2 3005,2305 ; U10.6@3044.02,2467.2 3017.2,2467.2 3005,2455 ; U9.6@3044.02,2617.2 3017.2,2617.2 3005,2605 ; U8.6@3044.02,2767.2 3017.2,2767.2 3005,2755 ; U7.6@3044.02,2917.2 3017.2,2917.2 3005,2905 ; U6.6@3044.02,3067.2 3017.2,3067.2 3005,3055 3005,2905 ; v1(3365,1970) 3445,2050 4025,2050 J13.10@4075,2000 ; 3005,2005 3005,2155 ; 3005,2155 3005,2305 ; 3005,2305 3005,2455 ; 3005,2455 3005,2605 ; 3005,2605 3005,2755 ; 3005,2755 3005,2905